# EAGLE board rfm69_carrier (EAGLE 7.1.0)

Size 31.42 x 26.66 mm. Coordinates in mm from the lower left corner, seen from the top.
Outline: 0,0 31.42,0 31.42,26.66 0,26.66 0,0
Copper layers (1*16): Top 0.035mm / dielectric 1.5mm / Bottom 0.035mm
Design rules "default": minimum track width 10mil, minimum drill 24mil, track to track 8mil, track to pad 8mil, pad to pad 8mil, via to via 8mil, smd to smd 8mil, copper to edge 40mil, drill to drill 8mil, minimum pad ring 10mil, minimum via ring 8mil, stop-mask expansion 4mil, vias tented up to drill 0mil, thermal gap 10mil

## Footprints (pad centres in the part's own frame; a part is rotated, then mirrored left to right if it is on the bottom)
SMA-EDGE = smd 1.524 x 4.064: GND@0 0,0; GND@1 5.08,0; SIG 2.54,0 | smd 1.524 x 4.064 bottom: GND@2 0,0; GND@3 5.08,0
C1206 = smd 1.6 x 1.8: 1 -1.4,0; 2 1.4,0
CHIP-LED0805 = smd 1.2 x 1.2: A 0,-1.05; C 0,1.05
MA12-2 = drill 1.016 octagon: 1 -13.97,-1.27; 2 -13.97,1.27; 3 -11.43,-1.27; 4 -11.43,1.27; 5 -8.89,-1.27; 6 -8.89,1.27; 7 -6.35,-1.27; 8 -6.35,1.27; 9 -3.81,-1.27; 10 -3.81,1.27; 11 -1.27,-1.27; 12 -1.27,1.27; 13 1.27,-1.27; 14 1.27,1.27; 15 3.81,-1.27; 16 3.81,1.27; 17 6.35,-1.27; 18 6.35,1.27; 19 8.89,-1.27; 20 8.89,1.27; 21 11.43,-1.27; 22 11.43,1.27; 23 13.97,-1.27; 24 13.97,1.27
R0603 = smd 1 x 1.1: 1 -0.85,0; 2 0.85,0
RFM69W-MINPADS = smd 2 x 1.27: ANA 8,-5; DIO0 -11.5,5; GND 8,-7; MISO 8,1; MOSI 8,3; NSS 8,5; SCK 8,-1; VDD -11.5,-7

## Placement (x,y rotation side)
ANT  SMA_EDGE  [SMA-EDGE]  29.21,12.7 270 top
C1  [C1206]  2.54,10.16 90 top
LED1  [CHIP-LED0805]  2.54,19.05 0 top
P9  [MA12-2]  15.24,2.54 0 top
R1  330  [R0603]  2.54,22.86 90 top
R2  10k  [R0603]  2.54,15.24 90 top
U1  RFM69  [RFM69W-MINPADS]  16.51,15.24 0 top

## Library data of the parts
ANT = SparkFun-Connectors
C1 R1 R2 = rcl
LED1 = led
P9 = con-lstb; OC_FARNELL: unknown; OC_NEWARK: unknown
U1 = LowPowerLab

## Nets
+3V3: C1.1 P9.3 R2.1 U1.VDD
DIO0: P9.13 U1.DIO0
GND: ANT.GND@0 ANT.GND@1 ANT.GND@2 ANT.GND@3 C1.2 LED1.C P9.1 P9.2 U1.GND
MISO: P9.21 U1.MISO
MOSI: P9.18 U1.MOSI
N$1: ANT.SIG U1.ANA
N$2: P9.11 R1.2
N$8: LED1.A R1.1
NSS: P9.15 U1.NSS
SCK: P9.22 R2.2 U1.SCK

## Tracks (layer width: path | path; a pad name or v marks a point on that pad's centre or on a via)
+3V3  (3 unrouted)
DIO0  (1 unrouted)
GND  (8 unrouted)
MISO  (1 unrouted)
MOSI  (1 unrouted)
N$1  (1 unrouted)
N$2  (1 unrouted)
N$8  (1 unrouted)
NSS  (1 unrouted)
SCK  (2 unrouted)